# Altium PCB DashBoard.PcbDoc (part 1 of 2)
Units mm, origin at the board's own origin, x right, y up, seen from the top; angles counter-clockwise.
Board outline 137.91 x 120.93 mm, 2 copper layers (Top Layer, Bottom Layer); 50 components, 83 nets, 335 pads, 92 vias.
Unrouted connection lines stored in the file: 1.
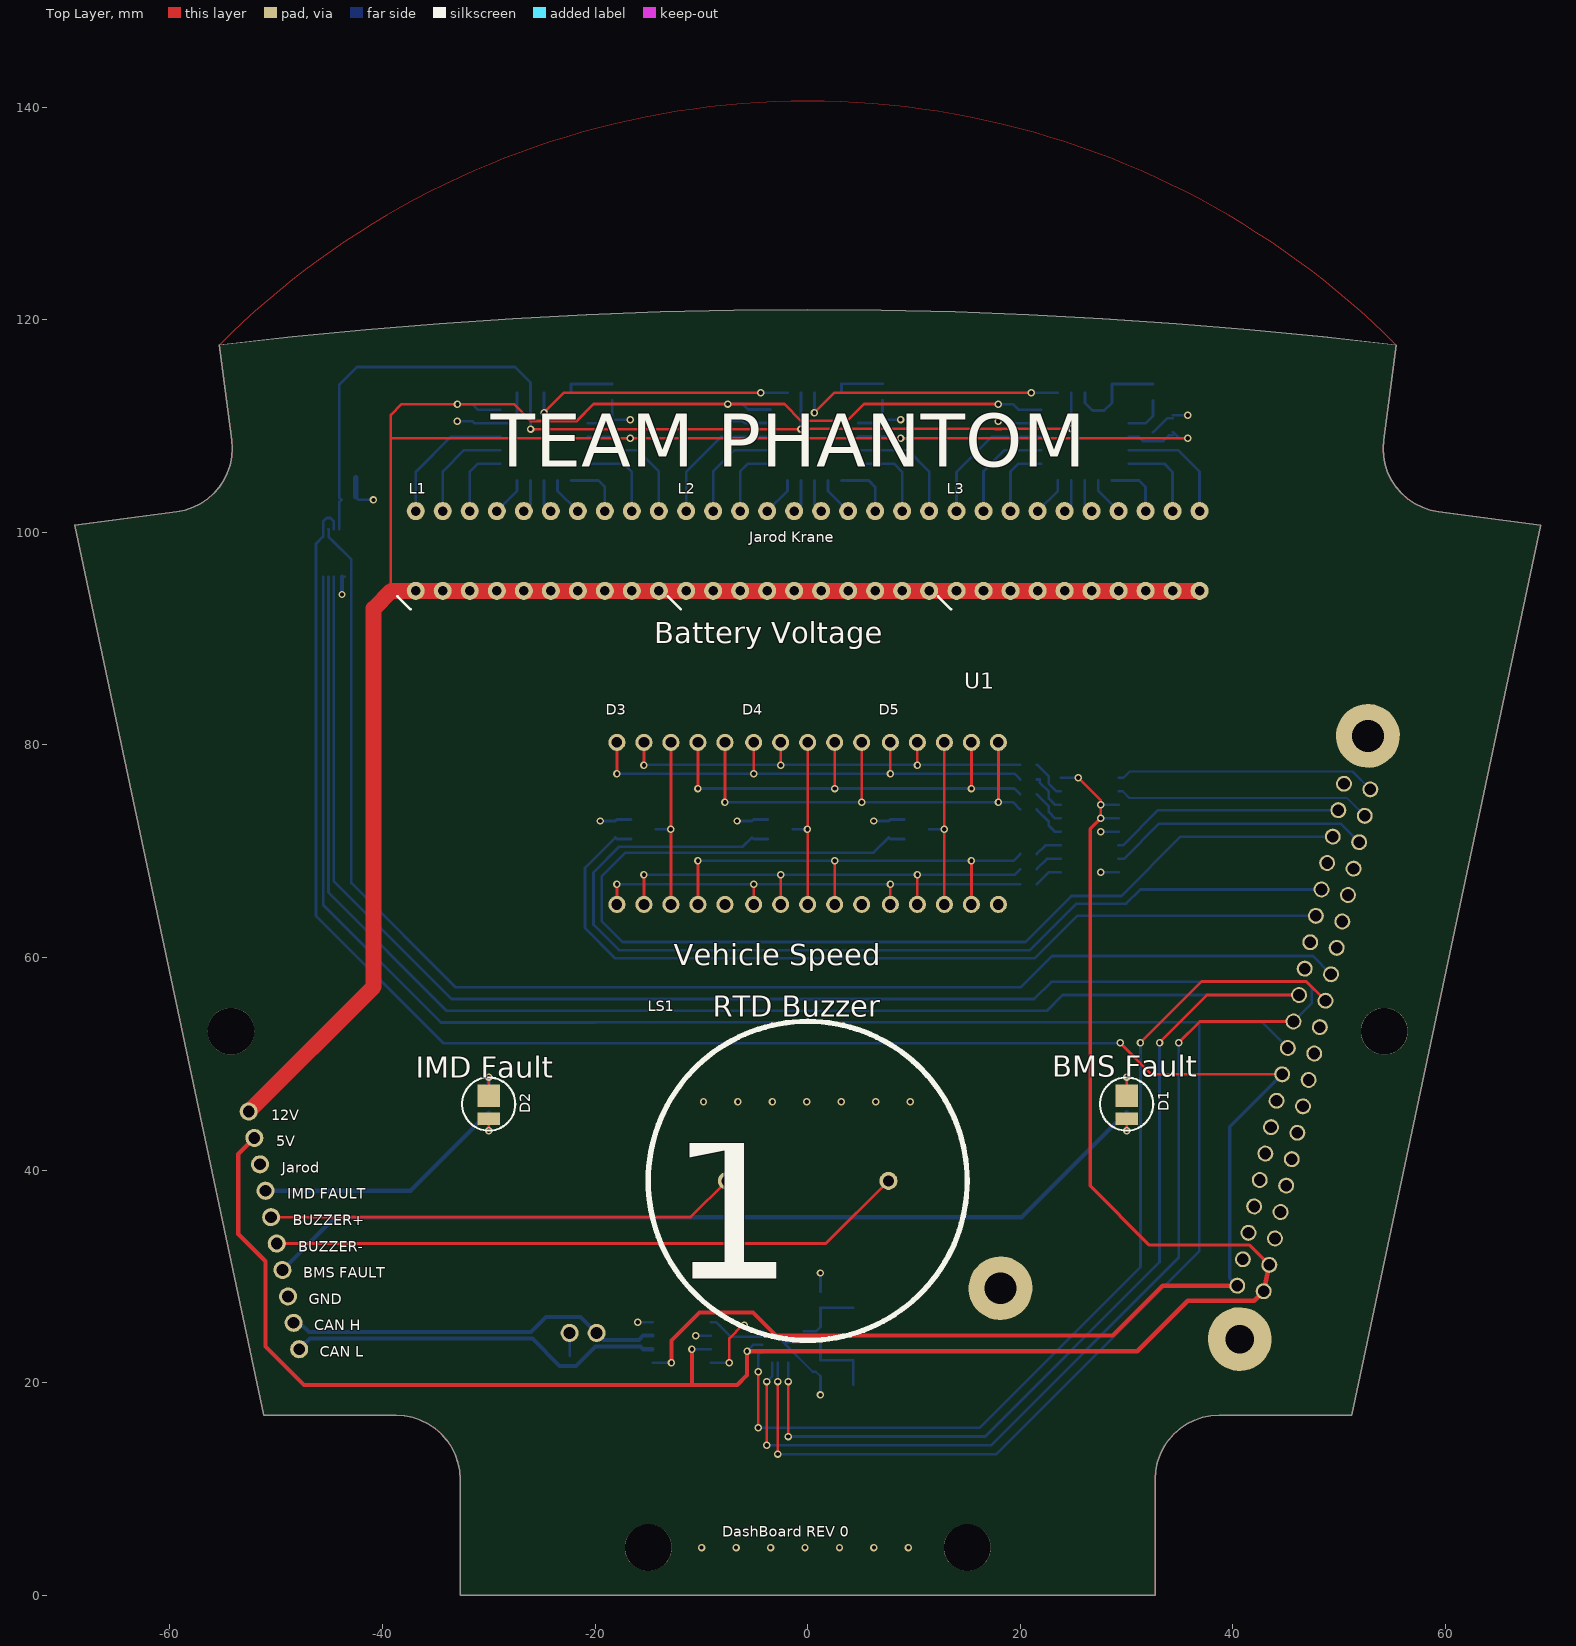
[diagram p0: Top Layer view]
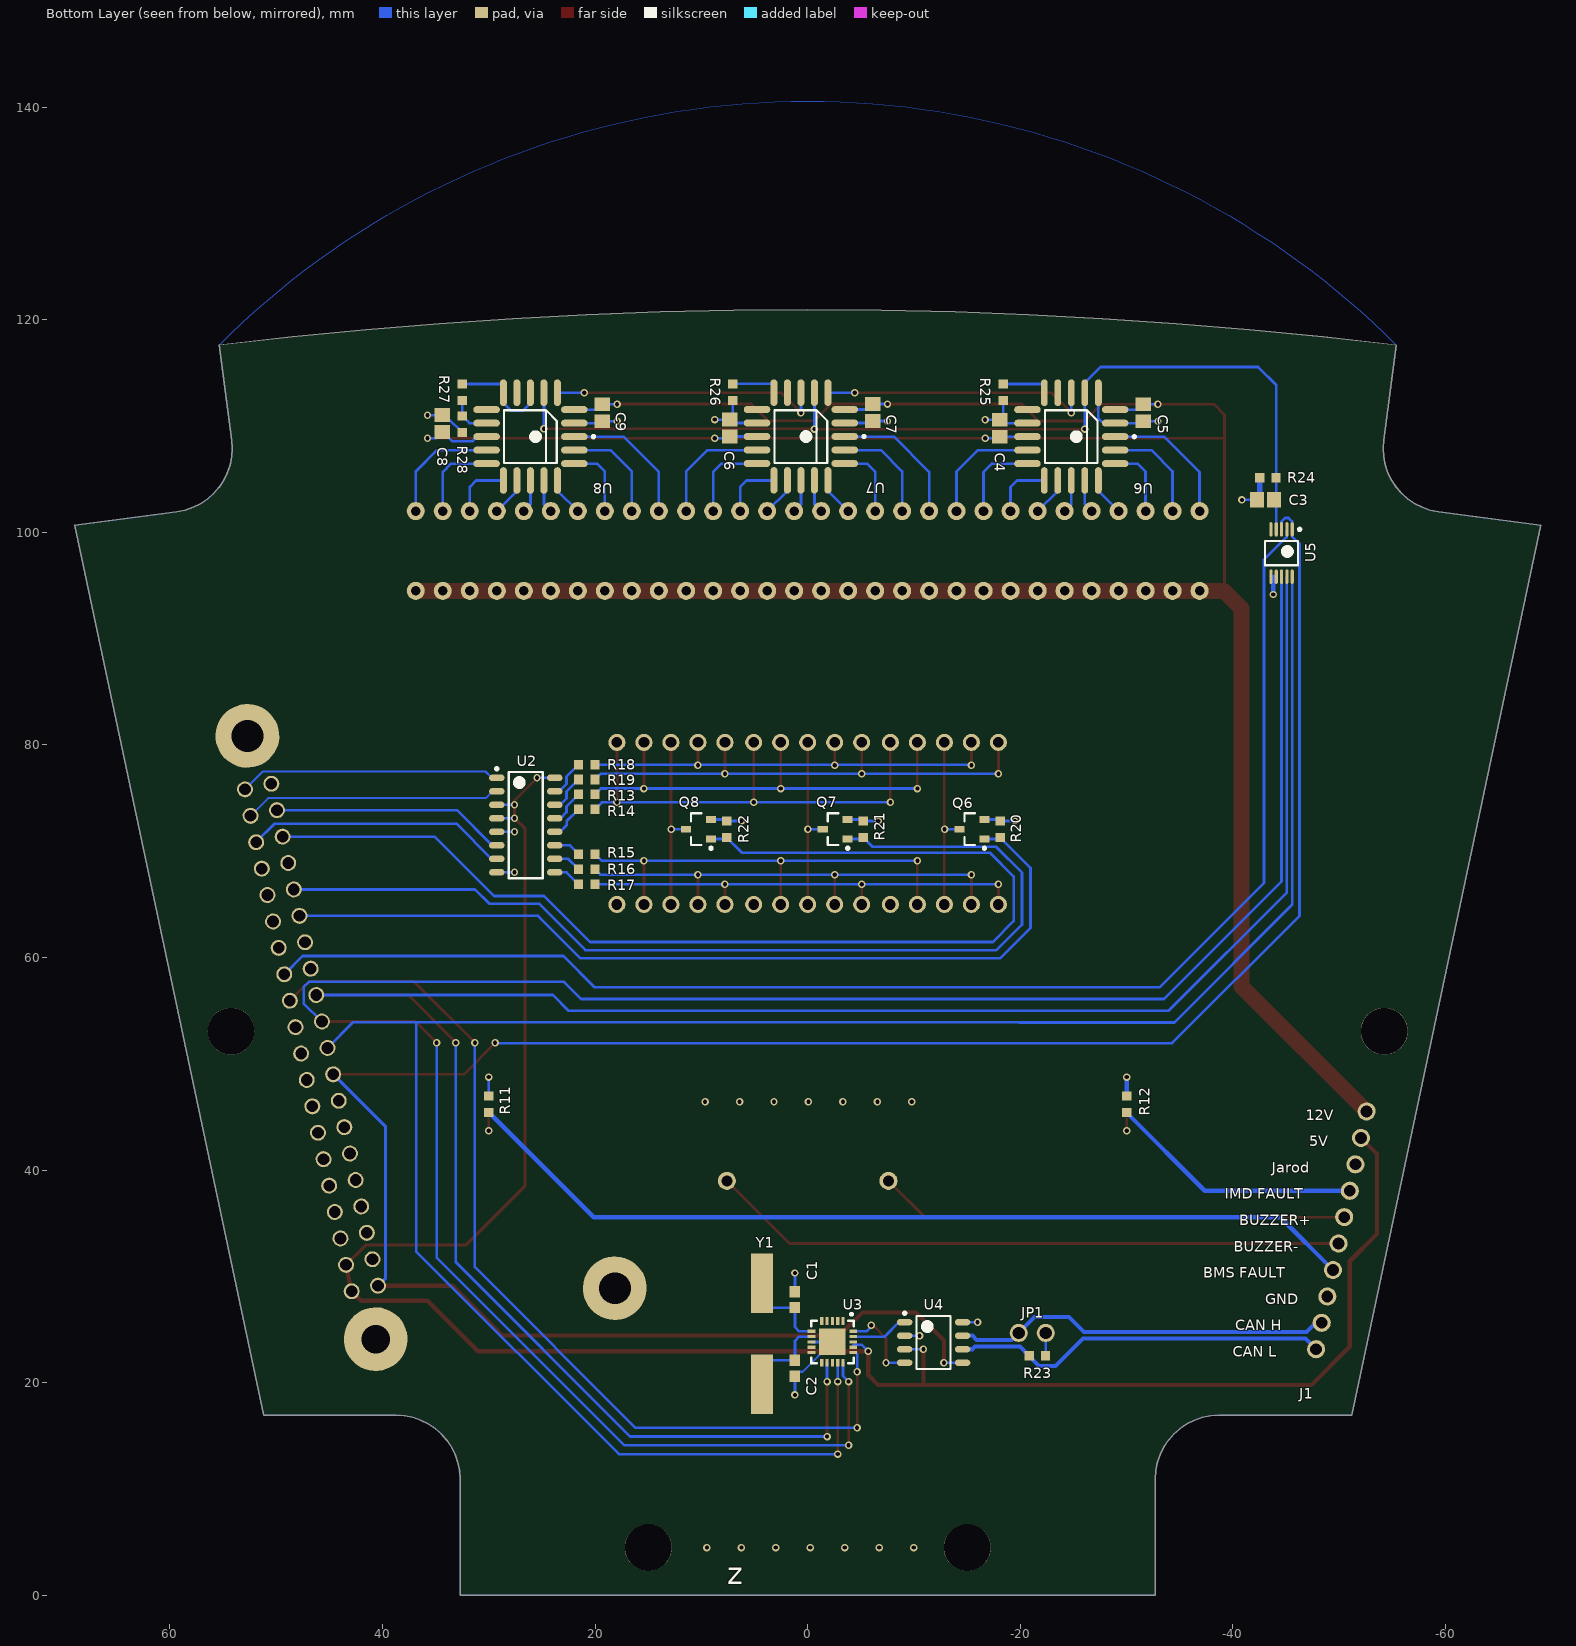
[diagram p1: Bottom Layer view, seen from below]
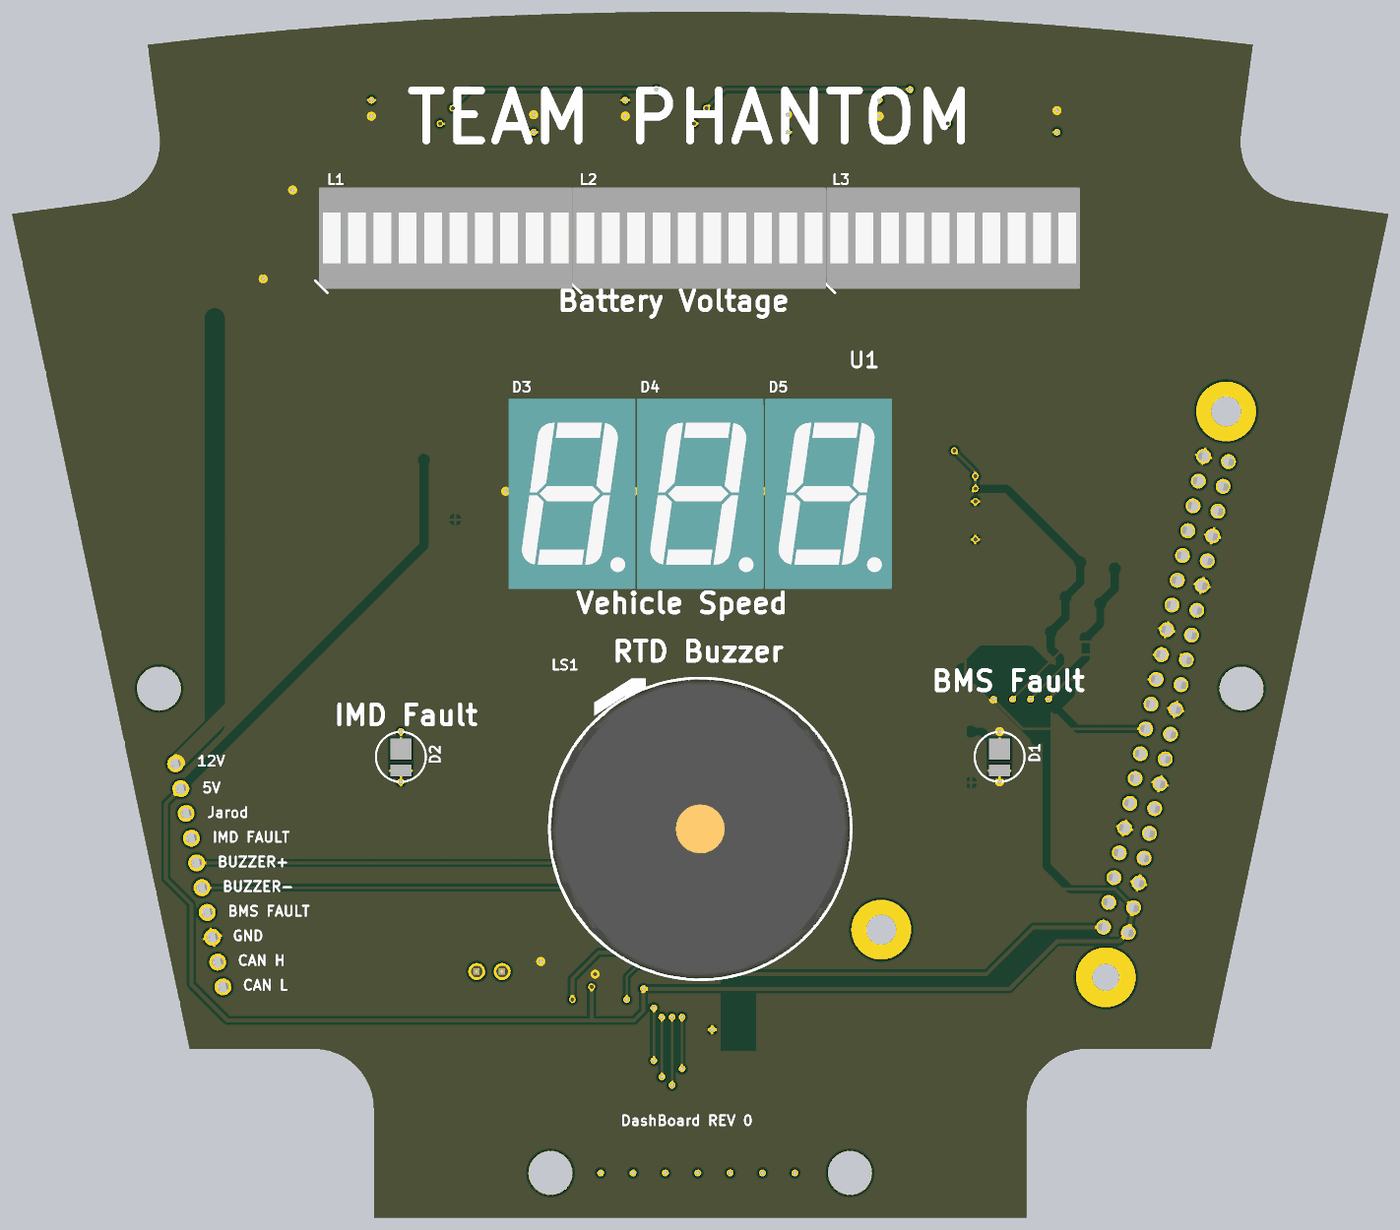
[diagram p2: 3D render of the assembled board from above, using the file's embedded part models]
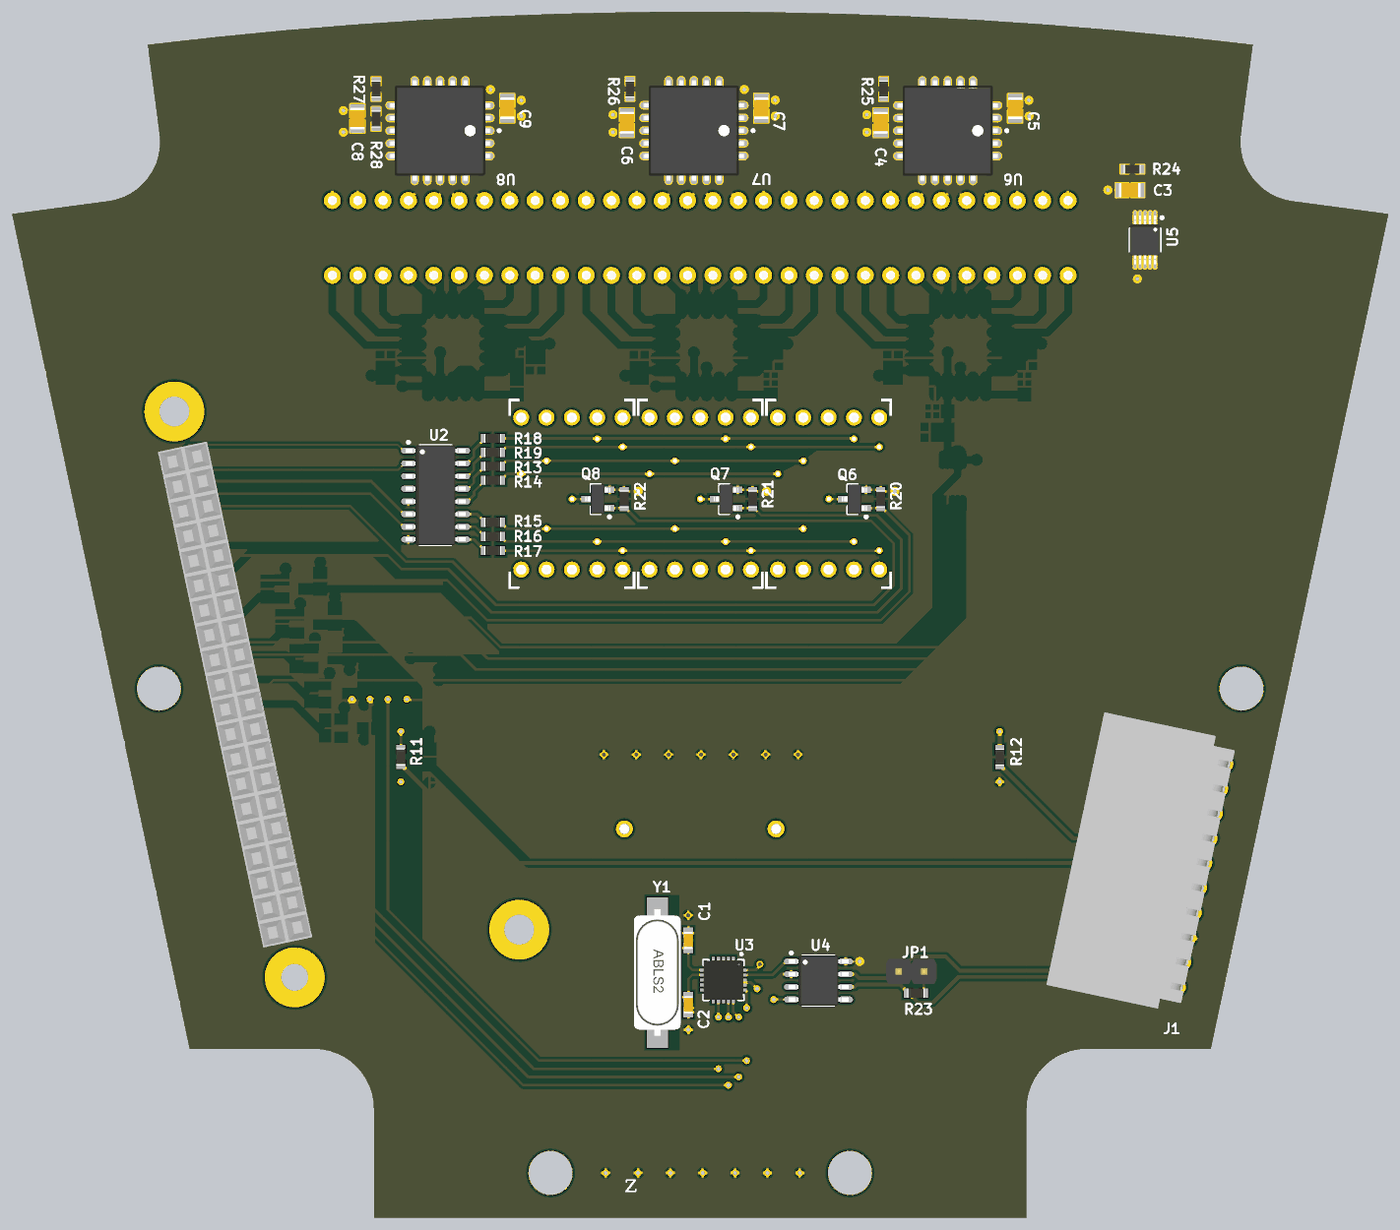
[diagram p3: 3D render of the assembled board from below, using the file's embedded part models]

## Layer stack, top to bottom
Top Solder: solder mask 0.0102, Solder Resist, Dk 3.5
Top Layer: signal copper 0.0356
Dielectric 1: dielectric 0.32, FR-4, Dk 4.8
Bottom Layer: signal copper 0.0356
Bottom Solder: solder mask 0.0102, Solder Resist, Dk 3.5

## Board outline
55.363,117.618 48.47,118.394 41.565,119.067 34.652,119.637 27.731,120.103 20.804,120.466 13.872,120.725 6.937,120.881 0,120.933 -6.937,120.881 -13.872,120.725 -20.804,120.466 -27.731,120.103 -34.652,119.637 -41.565,119.067 -48.47,118.394 -55.363,117.618 -54.173,108.674 -54.12,107.891 -54.171,107.108 -54.323,106.338 -54.574,105.594 -54.92,104.89 -55.355,104.237 -55.872,103.646 -56.461,103.128 -57.113,102.691 -57.817,102.343 -58.56,102.089 -59.329,101.935 -68.954,100.654 -51.163,16.954 -38.695,16.954 -37.912,16.903 -37.142,16.75 -36.399,16.498 -35.695,16.151 -35.042,15.715 -34.452,15.197 -33.935,14.607 -33.499,13.954 -33.152,13.251 -32.899,12.507 -32.746,11.738 -32.695,10.954 -32.695,0.006 32.695,0.006 32.695,10.954 32.746,11.738 32.899,12.507 33.152,13.251 33.499,13.954 33.935,14.607 34.452,15.197 35.042,15.715 35.695,16.151 36.399,16.498 37.142,16.75 37.912,16.903 38.695,16.954 51.163,16.954 68.954,100.654 59.329,101.935 58.56,102.089 57.818,102.342 57.115,102.69 56.464,103.126 55.875,103.643 55.358,104.233 54.923,104.885 54.576,105.589 54.325,106.331 54.172,107.1 54.12,107.883 54.173,108.674

## Design rules (kind name [scope] priority, off if disabled: settings)
Clearance [All] p1: gap=0.254 ignorepadtopadclearanceinfootprint=TRUE except(0: Arc-Hole Track-Hole SMDPad-Hole THPad-Hole Via-Hole Fill-Hole Poly-Hole Region-Hole Text-Hole; 0.127: Arc-Arc Arc-Track Track-Track; 0.2: Arc-SMDPad Track-SMDPad SMDPad-SMDPad)
ComponentClearance [All] p1: gap=0.01 collisioncheckmode=3 verticalgap=0.254 showdistances=FALSE
DiffPairsRouting [All] p1: maxlimit=0.254 minlimit=0.254 mostfreqgap=0.254 toplayer_minwidth=0.381 toplayer_maxwidth=0.381 toplayer_prefwidth=0.381 bottomlayer_minwidth=0.381 bottomlayer_maxwidth=0.381 bottomlayer_prefwidth=0.381 maxuncoupledlength=12.7
PolygonConnect [All] p1: connectstyle=Relief reliefconductorwidth=0.254 reliefentries=4 polygonreliefangle="90 Angle" airgapwidth=0.254
RoutingVias [All] p1: holewidth=0.711 width=1.27 viastyle="Through Hole" minholewidth=0.6 minwidth=0.3 maxholewidth=0.711 maxwidth=1.27
SolderMaskExpansion [All] p1: expansion=0.102
Width [All] p1: maxlimit=3 minlimit=0.127 preferedwidth=0.254 minimp=50.000000 maximp=50.000000 favimp=50.000000
28 further rules are at their usual default settings.

## Classes and differential pairs
component class VoltageLEDs: C4 C5 C6 C7 C8 C9 L1 L2 L3 R25 R26 R27 R28 U6 U7 U8
component class SPI: C1 C2 C3 JP1 R23 R24 U3 U4 U5 Y1
component class SpeedLEDs: D3 D4 D5 Q6 Q7 Q8 R13 R14 R15 R16 R17 R18 R19 R20 R21 R22 U2
component class Connector: D1 D2 J1 LS1 R11 R12 U1
differential pair CAN: +CAN_P -CAN_N

## Components (designator, comment, footprint, x,y, rotation, side; value= is the part's Value field where it differs from the comment)
C1 "15pF" CAP-0603 1.2,27.825 r270 bottom
C2 "15pF" CAP-0603 1.2,21.375 r90 bottom
C3 "0.1uF" CAP-0805 -43.05,103.05 r180 bottom
C4 "1uF" CAP-0805 -18.085,109.795 r270 bottom
C5 "0.1uF" CAP-0805 -31.555,111.25 r90 bottom
C6 "1uF" CAP-0805 7.345,109.8 r270 bottom
C7 "0.1uF" CAP-0805 -6.115,111.26 r90 bottom
C8 "1uF" CAP-0805 34.36,110.22 r270 bottom
C9 "0.1uF" CAP-0805 19.325,111.25 r90 bottom
D1 "Red" LED 30,47 r270 top
D2 "Red" LED -30,47 r270 top
D3 "SC56-11SRWA" 7-seg -17.94,65 r0 top locked
D4 "SC56-11SRWA" 7-seg -5.08,65 r0 top locked
D5 "SC56-11SRWA" 7-seg 7.78,65 r0 top locked
J1 "WM4932-ND" 10PIN -52.575,45.525 r282 bottom
JP1 "732-5315-ND" 2PIN-JP -19.85,24.7 r180 bottom
L1 "754-1176-5-ND" LEDBAR-10 -36.86,94.5 r0 top
L2 "754-1179-5-ND" LEDBAR-10 -11.43,94.5 r0 top
L3 "67-1008-ND" LEDBAR-10 14,94.5 r0 top
LS1 "102-1141-ND" Buzzer -7.6,39 r0 top locked
Q6 "DMN6140L-13DICT-ND" SOT-23-3 -15.45,72.075 r0 bottom
Q7 "DMN6140L-13DICT-ND" SOT-23-3 -2.59,72.075 r0 bottom
Q8 "DMN6140L-13DICT-ND" SOT-23-3 10.27,72.075 r0 bottom
R11 "44R" RES-0603 30,46.225 r90 bottom
R12 "44R" RES-0603 -30,46.2 r90 bottom
R13 "270R" RES-0603 20.78,75.35 r180 bottom
R14 "270R" RES-0603 20.78,73.95 r180 bottom
R15 "270R" RES-0603 20.78,69.74 r180 bottom
R16 "270R" RES-0603 20.78,68.315 r180 bottom
R17 "270R" RES-0603 20.78,66.89 r180 bottom
R18 "270R" RES-0603 20.78,78.15 r180 bottom
R19 "270R" RES-0603 20.78,76.75 r180 bottom
R20 "10K" RES-0603 -18.095,72.075 r270 bottom
R21 "10K" RES-0603 -5.235,72.075 r270 bottom
R22 "10K" RES-0603 7.625,72.075 r270 bottom
R23 "120R" RES-0603 -21.615,22.54 r180 bottom
R24 "10K" RES-0603 -43.295,105.15 r180 bottom
R25 "1K" RES-0603 -18.385,113.175 r90 bottom
R26 "1K" RES-0603 7.045,113.185 r90 bottom
R27 "2.2K" RES-0603 32.485,113.175 r90 bottom
R28 "3.3K" RES-0603 32.485,110.175 r90 bottom
U1 "RaspberryPi 4 Launchpad" "RPI CONNECTOR" 50,85 r258 top locked
U2 "MC14511BDR2G" SOIC16 26.516,72.465 r180 bottom
U3 "MCP2515" QFN20-EP -2.325,23.85 r270 bottom
U4 "MCP2562T-E/SNCT-ND" "8-SOIC w/o THRM" -11.85,23.8 r180 bottom
U5 "MCP48FVB01T-E/UN" 10MSOP -44.57,98.05 r270 bottom
U6 "LM3914VX/NOPB" PLCC127P990X990X457-20N -24.795,109 r270 bottom
U7 "LM3914VX/NOPB" PLCC127P990X990X457-20N 0.635,109.01 r270 bottom
U8 "LM3914VX/NOPB" PLCC127P990X990X457-20N 26.075,109 r270 bottom
Y1 "535-9875-1-ND" CRYSTAL-ABLS2 4.3,29.35 r270 bottom

## Footprints (in the part's own frame and the unit in brackets; to place one, negate y for a bottom-side part, rotate by r counter-clockwise, add the part's x,y. Pads: shape width x height; smd on the part's side, far side on the other; paste and mask are expansions set on the pad)
2PIN-JP [mm]
  round 1.7 hole 1.15: 1(0,0) 2(2.54,0)
  body extent -1.24,-1.27 3.84,1.27, height 8.57
7-seg [mm]
  round 1.6 hole 1 unplated: 1(0,0) 2(2.54,0) 3(5.08,0) 4(7.62,0) 5(10.16,0) 6(10.16,15.24) 7(7.62,15.24) 8(5.08,15.24) 9(2.54,15.24) 10(0,15.24)
  body extent -1.27,-1.92 11.43,17.13, height 7.5
"8-SOIC w/o THRM" [mm] "SOIC, 8-Leads, Body 4.90x3.90mm, Pitch 1.27mm, IPC Medium Density"
  oval 1.45x0.6 smd: 1(-2.725,1.905) 2(-2.725,0.635) 3(-2.725,-0.635) 4(-2.725,-1.905) 5(2.725,-1.905) 6(2.725,-0.635) 7(2.725,0.635) 8(2.725,1.905)
  silkscreen extent -2.85,-2.5 1.6,2.88, body extent -3,-2.5 3,2.5, height 1.7
10MSOP [mm] "TSSOP, 10-Leads, Body 3.00x3.00mm, Pitch 0.50mm, IPC Medium Density"
  oval 1.35x0.3 smd: 1(-2.225,1) 2(-2.225,0.5) 3(-2.225,0) 4(-2.225,-0.5) 5(-2.225,-1) 6(2.225,-1) 7(2.225,-0.5) 8(2.225,0) 9(2.225,0.5) 10(2.225,1)
  silkscreen extent -2.35,-1.55 1.15,1.82, body extent -2.45,-1.55 2.45,1.55, height 1.1
10PIN [mm]
  round 1.7 hole 1.11: 1(0,0) 2(2.54,0) 3(5.08,0) 4(7.62,0) 5(10.16,0) 6(12.7,0) 7(15.24,0) 8(17.78,0) 9(20.32,0) 10(22.86,0)
  body extent -2.54,-12.89 25.4,0.69, height 7.06
Buzzer [mm]
  round 1.7 hole 1.05: 1(0,0) 2(15.2,0)
  silkscreen extent -7.4,-15 22.6,15, body extent -7.4,-15 22.6,15, height 10
CAP-0603 [mm] "Chip Capacitor, 2-Leads, Body 1.60x0.80mm, IPC Medium Density"
  rect 1.05x1 smd: 1(-0.75,0) 2(0.75,0)
  body extent -0.87,-0.48 0.88,0.47, height 0.9
CAP-0805 [mm] "Chip Capacitor, 2-Leads, Body 2.00x1.25mm, IPC Medium Density"
  rect 1.3x1.45 smd: 1(-0.8,0) 2(0.8,0)
  body extent -1.1,-0.73 1.1,0.72, height 1.35
CRYSTAL-ABLS2 [mm]
  rect 5.6x2.1 smd: 1(0,0) 2(9.5,0)
  body extent -1.6,-2.35 11.1,2.35, height 3.24
LED [mm]
  rect 2.1x2.1 smd: 1(0,0)
  rect 1.2x2.1 smd: 2(2.15,0)
LEDBAR-10 [mm]
  round 1.7 hole 0.9: 1(0,0) 2(2.54,0) 3(5.08,0) 4(7.62,0) 5(10.16,0) 6(12.7,0) 7(15.24,0) 8(17.78,0) 9(20.32,0) 10(22.86,0) 11(22.86,7.5) 12(20.32,7.5) 13(17.78,7.5) 14(15.24,7.5) 15(12.7,7.5) 16(10.16,7.5) 17(7.62,7.5) 18(5.08,7.5) 19(2.54,7.5) 20(0,7.5)
  silkscreen extent -1.73,-1.75 -0.5,-0.53, body extent -1.35,-1.35 24.05,8.81, height 8
PLCC127P990X990X457-20N [mm] "Leaded Chip Carrier, 20-Leads, Body 9.91x9.91mm, Pitch 1.270mm, IPC Medium Density"
  oval 0.65x2.5 smd: 1(0,4.125) 2(-1.27,4.125) 3(-2.54,4.125) 9(-2.54,-4.125) 10(-1.27,-4.125) 11(0,-4.125) 12(1.27,-4.125) 13(2.54,-4.125) 19(2.54,4.125) 20(1.27,4.125)
  oval 2.5x0.65 smd: 4(-4.125,2.54) 5(-4.125,1.27) 6(-4.125,0) 7(-4.125,-1.27) 8(-4.125,-2.54) 14(4.125,-2.54) 15(4.125,-1.27) 16(4.125,0) 17(4.125,1.27) 18(4.125,2.54)
  silkscreen extent -2.48,-2.47 2.47,6.05, body extent -5.15,-5.15 5.15,5.15, height 4.57
QFN20-EP [mm]
  rect 0.73x0.3 smd: 1(-1.965,1) 2(-1.965,0.5) 3(-1.965,0) 4(-1.965,-0.5) 5(-1.965,-1) 11(1.965,-1) 12(1.965,-0.5) 13(1.965,0) 14(1.965,0.5) 15(1.965,1)
  rect 0.3x0.73 smd: 6(-1,-1.965) 7(-0.5,-1.965) 8(0,-1.965) 9(0.5,-1.965) 10(1,-1.965) 16(1,1.965) 17(0.5,1.965) 18(0,1.965) 19(-0.5,1.965) 20(-1,1.965)
  rect 2.5x2.5 smd: 21(0,0)
  silkscreen extent -2.7,-2 2,2, body extent -2,-2 2,2, height 0.92
RES-0603 [mm] "Chip Resistor, 2-Leads, Body 1.60x0.80mm, IPC Medium Density"
  rect 0.85x0.9 smd: 1(-0.775,0) 2(0.775,0)
  body extent -0.85,-0.45 0.85,0.45, height 0.55
"RPI CONNECTOR" [mm]
  round 6 hole 3 unplated: 0(3.5,3.5)
  round 6 hole 3: 0(61.5,-19.5)
  round 6 hole 2.7 unplated: 0(61.5,3.5)
  round 1.5 hole 1.1 unplated: 1(56.63,2.23) 2(56.63,4.77) 3(54.09,2.23) 4(54.09,4.77) 5(51.55,2.23) 6(51.55,4.77) 7(49.01,2.23) 8(49.01,4.77) 9(46.47,2.23) 10(46.47,4.77) 11(43.93,2.23) 12(43.93,4.77) 13(41.39,2.23) 14(41.39,4.77) 15(38.85,2.23) 16(38.85,4.77) 17(36.31,2.23) 18(36.31,4.77) 19(33.77,2.23) 20(33.77,4.77) 21(31.23,2.23) 22(31.23,4.77) 23(28.69,2.23) 24(28.69,4.77) 25(26.15,2.23) 26(26.15,4.77) 27(23.61,2.23) 28(23.61,4.77) 29(21.07,2.23) 30(21.07,4.77) 31(18.53,2.23) 32(18.53,4.77) 33(15.99,2.23) 34(15.99,4.77) 35(13.45,2.23) 36(13.45,4.77) 37(10.91,2.23) 38(10.91,4.77) 39(8.37,2.23) 40(8.37,4.77)
  body extent 7.13,0.94 57.93,5.96, height 2.51
SOIC16 [mm] "SOIC, 16-Leads, Body 9.90x3.90mm, Pitch 1.27mm, IPC Medium Density"
  oval 1.45x0.6 smd: 1(-2.725,4.445) 2(-2.725,3.175) 3(-2.725,1.905) 4(-2.725,0.635) 5(-2.725,-0.635) 6(-2.725,-1.905) 7(-2.725,-3.175) 8(-2.725,-4.445) 9(2.725,-4.445) 10(2.725,-3.175) 11(2.725,-1.905) 12(2.725,-0.635) 13(2.725,0.635) 14(2.725,1.905) 15(2.725,3.175) 16(2.725,4.445)
  silkscreen extent -2.85,-5 1.6,5.42, body extent -3,-5 3,5, height 1.75
SOT-23-3 [mm] "SOT23, 3-Leads, Body 2.90x2.40mm, Pitch 0.92mm, IPC Medium Density"
  rect 0.95x0.65 smd: 1(-1.175,0.915) 2(1.175,0) 3(-1.175,-0.915)
  silkscreen extent -1.3,-1.5 0.7,1.91, body extent -1.25,-1.5 1.25,1.5, height 1.1

## Part data
C1 C2: library part 0603-15pF-100V, "CAP CER 15PF 100V C0G/NP0 0603", Case/Package=0603, Case Code (Metric)=1608, Dielectric=C0G, Manufacturer=Murata, Manufacturer Part Number=GRM1885C2A150JA01D, Max Operating Temperature=125°C, Min Operating Temperature=-55°C, Package Quantity=1, Supplier Part Number 1=490-1331-6-ND, Tolerance=5%, Voltage=100V, Capacitance=15pF, Case Code (Imperial)=0603, ComponentLink1Description=http://components.arrow.com/part/dataview/40422412S9717204N2606?src-supplier=Arrow, ComponentLink1URL=http://components.arrow.com/part/dataview/40422412S9717204N2606?src-supplier=Arrow, ComponentLink2Description=http://psearch.murata.com/capacitor/product/GRM1885C2A150JA01%23.pdf?src-supplier=Avnet, ComponentLink2URL=http://psearch.murata.com/capacitor/product/GRM1885C2A150JA01%23.pdf?src-supplier=Avnet, ComponentLink3Description=http://www.mouser.com/ds/2/281/c02e-2905.pdf?src-supplier=Mouser, ComponentLink3URL=http://www.mouser.com/ds/2/281/c02e-2905.pdf?src-supplier=Mouser, ComponentLink4Description=https://www.murata.com/~/media/webrenewal/support/library/catalog/products/capacitor/mlcc/c02e.ashx?la=en-us&src-supplier=Digi-Key, ComponentLink4URL=https://www.murata.com/~/media/webrenewal/support/library/catalog/products/capacitor/mlcc/c02e.ashx?la=en-us&src-supplier=Digi-Key, ComponentLink5Description=http://search.murata.co.jp/Ceramy/image/img/A01X/partnumbering_e_01.pdf?src-supplier=Digi-Key, ComponentLink5URL=http://search.murata.co.jp/Ceramy/image/img/A01X/partnumbering_e_01.pdf?src-supplier=Digi-Key, ComponentLink6Description=https://produktinfo.conrad.com/datenblaetter/450000-474999/451247-da-01-en-VS_KONDENSATOR_0603.pdf?src-supplier=Conrad, ComponentLink6URL=https://produktinfo.conrad.com/datenblaetter/450000-474999/451247-da-01-en-VS_KONDENSATOR_0603.pdf?src-supplier=Conrad, Depth=0.8mm, Height=0.8mm, Lead Free="Lead Free", Length=1.6mm, Material=Ceramic, Mount="Surface Mount", Packaging="Tape and Reel", Pricing 1="1=0.12, 10=0.088, 100=0.0413, 500=0.02896, 1000=0.02397 (USD)", Radiation Hardening=No, Stock 1=216098, Supplier 1=Digi-Key, Termination=SMD/SMT, Thickness=0.035inch, Voltage Rating=100V, Voltage Rating (DC)=100V, Width=0.8mm
C3 C5 C7 C9: library part C0805C104Z5VACTU, "CAP CER 0.1UF 50V Y5V 0805", Capacitance=100nF, Case/Package=0805, Case Code (Metric)=2012, Dielectric=Y5V, Dielectric Material=Ceramic, Manufacturer=KEMET, Max Operating Temperature=85°C, Min Operating Temperature=-30°C, Package Quantity=1, Supplier Part Number 1=399-1177-6-ND, Tolerance=80%, Voltage=50V, Case Code (Imperial)=0805, ComponentLink1Description=http://www.alliedelec.com/m/d/9bfe7773041ffe9d406e68bc7b377fdd.pdf?src-supplier=Allied+Electronics, ComponentLink1URL=http://www.alliedelec.com/m/d/9bfe7773041ffe9d406e68bc7b377fdd.pdf?src-supplier=Allied+Electronics, ComponentLink2Description=https://www.verical.com/server-webapp/html/getDatasheet?partID=37101&src-supplier=Verical, ComponentLink2URL=https://www.verical.com/server-webapp/html/getDatasheet?partID=37101&src-supplier=Verical, ComponentLink3Description=https://www.verical.com/server-webapp/html/getDatasheet?partID=321176&src-supplier=Verical, ComponentLink3URL=https://www.verical.com/server-webapp/html/getDatasheet?partID=321176&src-supplier=Verical, ComponentLink4Description=http://www.farnell.com/datasheets/2123124.pdf?src-supplier=Element14, ComponentLink4URL=http://www.farnell.com/datasheets/2123124.pdf?src-supplier=Element14, Depth=1.25mm, Dissipation Factor=5%, Height=0.9mm, Lead Free="Lead Free", Lead Pitch=0.75mm, Length=2mm, Manufacturer Part Number=C0805C104Z5VACTU, Mount="Surface Mount,PCB", Number of Pins=2, Packaging="Tape and Reel", Pricing 1="1=0.1, 10=0.057, 100=0.0254, 500=0.01818, 1000=0.01428 (USD)", Radiation Hardening=No, REACH SVHC="No SVHC", Stock 1=929243, Supplier 1=Digi-Key, Termination=SMD/SMT, Thickness=0.039inch, Voltage Rating=50V, Voltage Rating (DC)=50V, Width=0.049inch
C4 C6 C8: library part C0805C105K5PACTU, "CAP CER 1UF 50V X5R 0805", Case/Package=0805, Case Code (Metric)=2012, Dielectric=X5R, Dielectric Material=Ceramic, Manufacturer=KEMET, Max Operating Temperature=85°C, Min Operating Temperature=-55°C, Package Quantity=2500, Supplier Part Number 1=399-15436-6-ND, Tolerance=10%, Voltage Rating=50V, Capacitance=1uF, Case Code (Imperial)=0805, ComponentLink1Description=https://api.kemet.com/component-edge/download/datasheet/C0805C105K5PAC7800.pdf?src-supplier=Digi-Key, ComponentLink1URL=https://api.kemet.com/component-edge/download/datasheet/C0805C105K5PAC7800.pdf?src-supplier=Digi-Key, ComponentLink2Description=http://www.farnell.com/datasheets/2746140.pdf?src-supplier=Farnell, ComponentLink2URL=http://www.farnell.com/datasheets/2746140.pdf?src-supplier=Farnell, ComponentLink3Description=http://www.mouser.com/ds/2/212/KEM_C1006_X5R_SMD-1103249.pdf?src-supplier=Mouser, ComponentLink3URL=http://www.mouser.com/ds/2/212/KEM_C1006_X5R_SMD-1103249.pdf?src-supplier=Mouser, ComponentLink4Description=http://www.farnell.com/datasheets/2746140.pdf?src-supplier=Newark, ComponentLink4URL=http://www.farnell.com/datasheets/2746140.pdf?src-supplier=Newark, ComponentLink5Description=http://www.farnell.com/datasheets/2032728.pdf?src-supplier=Element14, ComponentLink5URL=http://www.farnell.com/datasheets/2032728.pdf?src-supplier=Element14, Lead Free="Lead Free", Length=0.079inch, Manufacturer Part Number=C0805C105K5PACTU, Mount="Surface Mount", Packaging="Tape and Reel", Pricing 1="1=0.33, 10=0.23, 100=0.1378, 500=0.10334, 1000=0.08726 (USD)", REACH SVHC="No SVHC", Stock 1=7193, Supplier 1=Digi-Key, Termination=SMD/SMT, Thickness=0.055inch, Voltage Rating (DC)=50V, Weight=0.000194oz, Width=0.049inch
D1 D2: library part RED_LED, "2835 PLCC2 RED WLD: 620NM TYP. 1", Case/Package=1113, Forward Voltage=2.4V, Lens Color=Colorless, Manufacturer=QT-Brightek, Manufacturer Part Number=QBHP686-RH, Supplier Part Number 1=1516-1369-6-ND, Test Current=150mA, Case Code (Imperial)=1113, Color=Red, ComponentLink1Description="http://www.qt-brightek.com/datasheet/QBHP686-XXH Series.pdf?src-supplier=Digi-Key", ComponentLink1URL="http://www.qt-brightek.com/datasheet/QBHP686-XXH Series.pdf?src-supplier=Digi-Key", Dominant Wavelength=620nm, Height=1mm, Length=3.1mm, Lens Style=Flat, Lens Transparency=Clear, Mount="Surface Mount", Packaging="Tape and Reel", Pricing 1="1=0.85, 10=0.553, 100=0.3625, 1000=0.2862 (USD)", Stock 1=3207, Supplier 1=Digi-Key, Viewing Angle=120°, Width=2.8mm
D3 D4 D5: library part 7-segment, "DISPLAY 7SEG 0.56\" SGL RED 10DIP", Case/Package=DIP, Color=Red, Forward Current=20mA, Forward Voltage=1.85V, Manufacturer=Kingbright, Max Operating Temperature=85°C, Max Power Dissipation=75mW, Min Operating Temperature=-40°C, Package Quantity=40, Supplier Part Number 1=754-1467-5-ND, ComponentLink1Description=http://www.farnell.com/datasheets/2047590.pdf?src-supplier=Element14, ComponentLink1URL=http://www.farnell.com/datasheets/2047590.pdf?src-supplier=Element14, ComponentLink2Description=http://www.mouser.com/ds/2/216/SC56-11SRWA-66719.pdf?src-supplier=Mouser, ComponentLink2URL=http://www.mouser.com/ds/2/216/SC56-11SRWA-66719.pdf?src-supplier=Mouser, ComponentLink3Description=http://www.kingbrightusa.com/images/catalog/SPEC/SC56-11SRWA.pdf?src-supplier=Future+Electronics, ComponentLink3URL=http://www.kingbrightusa.com/images/catalog/SPEC/SC56-11SRWA.pdf?src-supplier=Future+Electronics, Display Type=Segment, Element Configuration="Common Cathode", Height=0.75inch, Illumination Color=Red, Lead Free="Lead Free", Luminous Intensity=34mcd, Manufacturer Part Number=SC56-11SRWA, Number of Characters=1, Operating Supply Voltage=1.85V, Packaging=Bulk, Power Consumption=75mW, Pricing 1="1=1.96, 10=1.24, 100=0.9177, 500=0.84334, 1000=0.702 (USD)", REACH SVHC="No SVHC", RoHS Compliant=Yes, Stock 1=32391, Supplier 1=Digi-Key, Test Current=20mA, Wavelength=640nm, Width=0.5inch
J1: library part 10PIN, "CONN HEADER R/A 10POS 2.54MM", Color=Black, Contact Resistance=30mR, Manufacturer=Molex, Manufacturer Part Number=0705530044, Max Operating Temperature=105°C, Min Operating Temperature=-40°C, ComponentLink1Description=http://www.molex.com/webdocs/datasheets/pdf/en-us/0705530044_PCB_HEADERS.pdf?src-supplier=Avnet, ComponentLink1URL=http://www.molex.com/webdocs/datasheets/pdf/en-us/0705530044_PCB_HEADERS.pdf?src-supplier=Avnet, Connector Type="Male Pin", Contact Material=Bronze, Contact Mating Length=0.24inch, Contact Plating=Tin, Depth=13.59mm, Gender=Male, Housing Color=Black, Housing Material=Polyester, Length=27.95mm, Mount="Through Hole", Number of Contacts=10, Number of Positions=10, Number of Rows=1, Orientation="Right Angle", Packaging=Rail/Tube, Pitch=2.54mm, Pricing 1="1=2.61, 10=2.367, 100=2.0288, 500=1.69068, 1000=1.44915, 5000=1.28491 (USD)", Stock 1=1173, Supplier 1=Digi-Key, Supplier Part Number 1=WM4932-ND, Termination=Solder
JP1: library part 2PIN-TEST, "CONN HEADER VERT 2POS 2.54MM"
L1: "LED BAR GRAPH 10SEG 627NM RED", Color=Red, Current=30mA, Forward Current=20mA, Forward Voltage=2V, Lens Color=White, Manufacturer=Kingbright, Manufacturer Part Number=DC-10EWA, Max Operating Temperature=85°C, Min Operating Temperature=-40°C, Package Quantity=20, ComponentLink1Description=https://www.distrelec.biz/Web/Downloads/12/75/tl661272-661275.pdf?mime=application%2Fpdf&src-supplier=Distrelec, ComponentLink1URL=https://www.distrelec.biz/Web/Downloads/12/75/tl661272-661275.pdf?mime=application%2Fpdf&src-supplier=Distrelec, ComponentLink2Description=http://www.mouser.com/ds/2/216/DC10EWA-8483.pdf?src-supplier=Mouser, ComponentLink2URL=http://www.mouser.com/ds/2/216/DC10EWA-8483.pdf?src-supplier=Mouser, ComponentLink3Description=http://www.kingbrightusa.com/images/catalog/SPEC/DC10EWA.pdf?src-supplier=Digi-Key, ComponentLink3URL=http://www.kingbrightusa.com/images/catalog/SPEC/DC10EWA.pdf?src-supplier=Digi-Key, ComponentLink4Description=http://uk.rs-online.com/webdocs/1385/0900766b81385017.pdf?src-supplier=RSComponents, ComponentLink4URL=http://uk.rs-online.com/webdocs/1385/0900766b81385017.pdf?src-supplier=RSComponents, ComponentLink5Description=http://www.rapidonline.com/pdf/55-0190e.pdf?src-supplier=Rapid+Electronics, ComponentLink5URL=http://www.rapidonline.com/pdf/55-0190e.pdf?src-supplier=Rapid+Electronics, ComponentLink6Description=http://www.farnell.com/datasheets/1683489.pdf?src-supplier=Element14, ComponentLink6URL=http://www.farnell.com/datasheets/1683489.pdf?src-supplier=Element14, ComponentLink7Description=http://www.produktinfo.conrad.com/datenblaetter/175000-199999/184837-da-01-en-RGB_ROT_LED_BAND.pdf?src-supplier=Conrad, ComponentLink7URL=http://www.produktinfo.conrad.com/datenblaetter/175000-199999/184837-da-01-en-RGB_ROT_LED_BAND.pdf?src-supplier=Conrad, ComponentLink8Description=http://www.produktinfo.conrad.com/datenblaetter/150000-174999/160137-da-01-en-BARGRAPH_ANZEIGE_TYP_DC_10EWA.pdf?src-supplier=Conrad, ComponentLink8URL=http://www.produktinfo.conrad.com/datenblaetter/150000-174999/160137-da-01-en-BARGRAPH_ANZEIGE_TYP_DC_10EWA.pdf?src-supplier=Conrad, Display Type="Bar Graph", Height=10.16mm, Illumination Color=Red, Lead Free="Lead Free", Length=25.4mm, Lens Size=1.78mm, Lens Style=Diffused, Luminous Intensity=9mcd, Mount="Through Hole", Number of LEDs=10, Number of Segments=10, Operating Supply Voltage=2V, Packaging=Rail/Tube, Pricing 1="1=2.79, 10=2.474, 100=1.4364, 500=1.2768, 1000=1.09725, 2500=1.0374, 5000=1.01346, 10000=0.9975, 25000=0.97356 (USD)", REACH SVHC="No SVHC", Stock 1=21, Supplier 1=Digi-Key, Supplier Part Number 1=754-1176-5-ND, Voltage Rating=2V, Wavelength=625nm, Width=25.4mm
L2: library part LEDBAR-10-YLW, "LED BAR GRAPH 10SEG 590NM YLW", Color=Yellow, Current=30mA, Forward Current=20mA, Forward Voltage=2.1V, Lens Color=White, Manufacturer=Kingbright, Manufacturer Part Number=DC-10YWA, Max Operating Temperature=85°C, Min Operating Temperature=-40°C, Package Quantity=20, ComponentLink1Description=http://www.rapidonline.com/pdf/55-0190e.pdf?src-supplier=Rapid+Electronics, ComponentLink1URL=http://www.rapidonline.com/pdf/55-0190e.pdf?src-supplier=Rapid+Electronics, ComponentLink2Description=https://www.distrelec.biz/Web/Downloads/12/75/tl661272-661275.pdf?mime=application%2Fpdf&src-supplier=Distrelec, ComponentLink2URL=https://www.distrelec.biz/Web/Downloads/12/75/tl661272-661275.pdf?mime=application%2Fpdf&src-supplier=Distrelec, ComponentLink3Description=http://www.kingbrightusa.com/images/catalog/SPEC/DC10YWA.pdf?src-supplier=Digi-Key, ComponentLink3URL=http://www.kingbrightusa.com/images/catalog/SPEC/DC10YWA.pdf?src-supplier=Digi-Key, ComponentLink4Description=http://uk.rs-online.com/webdocs/0026/0900766b80026db8.pdf?src-supplier=RSComponents, ComponentLink4URL=http://uk.rs-online.com/webdocs/0026/0900766b80026db8.pdf?src-supplier=RSComponents, ComponentLink5Description=http://www.farnell.com/datasheets/1683491.pdf?src-supplier=Element14, ComponentLink5URL=http://www.farnell.com/datasheets/1683491.pdf?src-supplier=Element14, ComponentLink6Description=http://www.mouser.com/ds/2/216/DC10YWA-43302.pdf?src-supplier=Mouser, ComponentLink6URL=http://www.mouser.com/ds/2/216/DC10YWA-43302.pdf?src-supplier=Mouser, ComponentLink7Description=http://www.produktinfo.conrad.com/datenblaetter/150000-174999/160142-da-01-en-BARGRAPH_ANZEIGE_TYP_DC_10YWA.pdf?src-supplier=Conrad, ComponentLink7URL=http://www.produktinfo.conrad.com/datenblaetter/150000-174999/160142-da-01-en-BARGRAPH_ANZEIGE_TYP_DC_10YWA.pdf?src-supplier=Conrad, Display Type="Bar Graph", Height=10.16mm, Illumination Color=Yellow, Lens Size=3mm, Lens Style=Diffused,Round,Domed, Luminous Intensity=9mcd, Mount="Through Hole", Number of LEDs=10, Number of Pins=20, Number of Segments=10, Operating Supply Voltage=2.1V, Packaging=Rail/Tube, Pricing 1="1=2.84, 10=2.517, 100=1.4616, 500=1.2992, 1000=1.1165, 2500=1.0556, 5000=1.03124, 10000=1.015, 25000=0.99064 (USD)", REACH SVHC="No SVHC", Stock 1=23, Supplier 1=Digi-Key, Supplier Part Number 1=754-1179-5-ND, Voltage Rating=2.1V, Wavelength=588nm, Width=25.4mm
L3: library part LEDBAR-10-GRN, "LED ARRAY 10X25MM 10SEG GRN DIFF", Color=Green, Current=25mA, Forward Current=20mA, Forward Voltage=2.2V, Manufacturer=Lumex, Manufacturer Part Number=SSA-LXB10GW-GF/LP, Max Operating Temperature=85°C, Min Operating Temperature=-40°C, Operating Supply Voltage=2.6V, Package Quantity=20, Power Consumption=105mW, ComponentLink1Description=http://www.lumex.com/content/files/ProductAttachment/SSA-LXB10GW-GF-LP.pdf?src-supplier=Digi-Key, ComponentLink1URL=http://www.lumex.com/content/files/ProductAttachment/SSA-LXB10GW-GF-LP.pdf?src-supplier=Digi-Key, ComponentLink2Description=http://www.farnell.com/datasheets/677482.pdf?src-supplier=Farnell, ComponentLink2URL=http://www.farnell.com/datasheets/677482.pdf?src-supplier=Farnell, ComponentLink3Description=http://www.farnell.com/datasheets/677482.pdf?src-supplier=Element14, ComponentLink3URL=http://www.farnell.com/datasheets/677482.pdf?src-supplier=Element14, ComponentLink4Description=http://www.farnell.com/datasheets/269031.pdf?src-supplier=Element14, ComponentLink4URL=http://www.farnell.com/datasheets/269031.pdf?src-supplier=Element14, ComponentLink5Description=http://www.mouser.com/ds/2/244/SSA-LXB10GW-GF%20LP-115645.pdf?src-supplier=Mouser, ComponentLink5URL=http://www.mouser.com/ds/2/244/SSA-LXB10GW-GF%20LP-115645.pdf?src-supplier=Mouser, Display Type="Bar Graph", Height=6.8mm, Illumination Color=Green, Lead Free="Lead Free", Length=25.1mm, Lens Style=Diffused, Luminous Intensity=8mcd, Mount="Through Hole", Number of Contacts=18, Number of LEDs=10, Packaging=Bulk, Pricing 1="1=2.28, 10=2.018, 100=1.1718, 500=1.0416, 1000=0.89513, 2500=0.8463, 5000=0.82677, 10000=0.81375 (USD)", REACH SVHC="No SVHC", Stock 1=6048, Supplier 1=Digi-Key, Supplier Part Number 1=67-1008-ND, Viewing Angle=160°, Voltage Rating=2.2V, Wavelength=565nm, Width=10.1mm
LS1: library part Buzzer, "AUDIO PIEZO TRANSDUCER 30V TH", Capacitance=28nF, Case/Package=Radial, Manufacturer=CUI, Manufacturer Part Number=CEP-1116, Max Operating Temperature=85°C, Min Operating Temperature=-30°C, Operating Supply Current=8mA, Self Resonant Frequency=2kHz, Voltage Rating=10V, Diameter=30mm, Height=10.5mm, Lead Free="Lead Free", Mount="Through Hole", Packaging=Bulk, Pricing 1="1=1.91, 10=1.588, 25=1.468, 50=1.3806, 100=1.2963, 500=1.11268, 1000=1.0621 (USD)", Stock 1=11267, Supplier 1=Digi-Key, Supplier Part Number 1=102-1141-ND, Termination="PC Pins", Washable=No
Q6 Q7 Q8: library part N-FET-60V-1.6A, "MOSFET N-CH 60V 1.6A SOT23", Case/Package=TO-236-3, Continuous Drain Current (ID)=1.6A, Drain to Source Voltage (Vdss)=60V, Input Capacitance=315pF, Manufacturer=Diodes, Manufacturer Part Number=DMN6140L-13, Max Operating Temperature=150°C, Max Power Dissipation=700mW, Min Operating Temperature=-55°C, Package Quantity=10000, Supplier Part Number 1=DMN6140L-13DIDKR-ND, ComponentLink1Description=https://www.diodes.com/assets/Datasheets/DMN6140L.pdf?src-supplier=Digi-Key, ComponentLink1URL=https://www.diodes.com/assets/Datasheets/DMN6140L.pdf?src-supplier=Digi-Key, Mount="Surface Mount", Packaging="Cut Tape", Pricing 1="1=0.34, 10=0.256, 25=0.224, 100=0.1217, 250=0.12104, 500=0.09926, 1000=0.07365, 2500=0.06468, 5000=0.05924 (USD)", Rds On Max=140mR, Stock 1=274948, Supplier 1=Digi-Key
R11 R12: library part 0603-44R, Case/Package=0603, Case Code (Metric)=1608, Manufacturer=Panasonic, Manufacturer Part Number=ERJ-3EKF44R2V, Max Operating Temperature=155°C, Max Power Dissipation=100mW, Min Operating Temperature=-55°C, Package Quantity=1, Resistance=44.2R, Resistance Tolerance=1%, Resistor Type="Thick Film", Supplier Part Number 1=P44.2HDKR-ND, Temperature Coefficient=100ppm/°C, Voltage Rating=75V, Voltage Rating (DC)=50V, Case Code (Imperial)=0603, ComponentLink1Description=http://industrial.panasonic.com/www-data/pdf/AOA0000/AOA0000CE2.pdf?src-supplier=Avnet, ComponentLink1URL=http://industrial.panasonic.com/www-data/pdf/AOA0000/AOA0000CE2.pdf?src-supplier=Avnet, ComponentLink2Description=http://industrial.panasonic.com/cdbs/www-data/pdf/RDA0000/AOA0000C304.pdf?src-supplier=Farnell, ComponentLink2URL=http://industrial.panasonic.com/cdbs/www-data/pdf/RDA0000/AOA0000C304.pdf?src-supplier=Farnell, ComponentLink3Description=http://www.farnell.com/datasheets/426256.pdf?src-supplier=Element14, ComponentLink3URL=http://www.farnell.com/datasheets/426256.pdf?src-supplier=Element14, Construction=Rectangular, Contact Plating=Tin, Depth=0.8mm, Features="Automotive AEC-Q200", Height=0.022inch, Length=1.6mm, Military Standard=Not, Mount="Surface Mount", Number of Terminations=2, Packaging="Tape and Reel", Power Rating=100mW, Pricing 1="1=0.1, 10=0.037, 100=0.0149, 1000=0.0067, 2500=0.00582 (USD)", REACH SVHC="No SVHC", RoHS Compliant=Yes, Series=ERJ, Stock 1=31052, Supplier 1=Digi-Key, Termination=SMD/SMT, Tolerance=1%, Weight=7.1E-05oz, Width=0.8mm
R13 R14 R15 R16 R17 R18 R19: library part 0603-270R, "RES SMD 270 OHM 0.5% 1/10W 0603", Case/Package=0603, Case Code (Metric)=1608, Manufacturer=Yageo, Manufacturer Part Number=RT0603DRE07270RL, Max Operating Temperature=155°C, Max Power Dissipation=100mW, Min Operating Temperature=-55°C, Package Quantity=5000, Resistor Type="Thin Film", Supplier Part Number 1=311-2504-1-ND, Temperature Coefficient=50ppm/°C, Tolerance=0.5%, Voltage Rating=75V, Voltage Rating (DC)=50V, Case Code (Imperial)=0603, ComponentLink1Description=http://www.yageo.com/NewPortal/yageodocoutput?fileName=/pdf/R-Chip/PYu-RT_1-to-0.05_RoHS_L_5.pdf&src-supplier=Digi-Key, ComponentLink1URL=http://www.yageo.com/NewPortal/yageodocoutput?fileName=/pdf/R-Chip/PYu-RT_1-to-0.05_RoHS_L_5.pdf&src-supplier=Digi-Key, Features="Moisture Resistant", Height=0.022inch, Lead Free="Lead Free", Length=0.063inch, Number of Terminations=2, Packaging="Tape and Reel", Power Rating=100mW, Pricing 1="1=0.1, 10=0.092, 100=0.0352, 1000=0.01549, 2500=0.01338 (USD)", Resistance=270R, RoHS Compliant=Yes, Series=RT, Stock 1=5811, Supplier 1=Digi-Key, Termination=SMD/SMT, Width=0.031inch
R20 R21 R22: library part 0603-10KR, "RES SMD 10K OHM 5% 1/10W 0603", Case/Package=0603, Case Code (Metric)=1608, Manufacturer=Yageo, Manufacturer Part Number=RC0603JR-0710KL, Max Operating Temperature=155°C, Max Power Dissipation=100mW, Min Operating Temperature=-55°C, Resistance=10kR, Supplier Part Number 1=311-10KGRDKR-ND, Temperature Coefficient=100ppm/°C, Tolerance=5%, Voltage Rating=50V, Case Code (Imperial)=0603, ComponentLink1Description=http://www.yageo.com/documents/recent/PYu-RC_Group_51_RoHS_L_10.pdf?src-supplier=Digi-Key, ComponentLink1URL=http://www.yageo.com/documents/recent/PYu-RC_Group_51_RoHS_L_10.pdf?src-supplier=Digi-Key, Composition="Thick Film", Contact Plating=Tin,Matte, Depth=0.8mm, Features="Moisture Resistant", Height - Seated (Max)=0.022inch, Lead Free="Lead Free", Length=0.063inch, Military Standard=Not, Number of Pins=2, Number of Terminations=2, Packaging="Tape and Reel", Power Rating=100mW, Pricing 1="1=0.1, 10=0.019, 100=0.0077, 1000=0.00347, 2500=0.00301 (USD)", Radiation Hardening=No, REACH SVHC=Unknown, Stock 1=3006558, Supplier 1=Digi-Key, Termination=SMD/SMT, Voltage Rating (DC)=50V, Width=0.031inch
R23: library part 0603-120R, "RES SMD 120 OHM 1% 1/10W 0603", Case/Package=0603, Case Code (Metric)=1608, Manufacturer=Yageo, Manufacturer Part Number=RC0603FR-07120RL, Max Operating Temperature=155°C, Max Power Dissipation=100mW, Min Operating Temperature=-55°C, Package Quantity=1, Supplier Part Number 1=311-120HRDKR-ND, Temperature Coefficient=100ppm/°C, Tolerance=1%, Voltage Rating=50V, Case Code (Imperial)=0603, ComponentLink1Description=http://www.yageo.com/documents/recent/PYu-RC_Group_51_RoHS_L_10.pdf?src-supplier=Digi-Key, ComponentLink1URL=http://www.yageo.com/documents/recent/PYu-RC_Group_51_RoHS_L_10.pdf?src-supplier=Digi-Key, ComponentLink2Description=http://www.farnell.com/datasheets/2167052.pdf?src-supplier=Element14, ComponentLink2URL=http://www.farnell.com/datasheets/2167052.pdf?src-supplier=Element14, ComponentLink3Description=http://www.farnell.com/datasheets/1868787.pdf?src-supplier=Element14, ComponentLink3URL=http://www.farnell.com/datasheets/1868787.pdf?src-supplier=Element14, ComponentLink4Description=http://www.farnell.com/datasheets/443971.pdf?src-supplier=Element14, ComponentLink4URL=http://www.farnell.com/datasheets/443971.pdf?src-supplier=Element14, Composition="Thick Film", Depth=0.8mm, Features="Moisture Resistant", Height=0.022inch, Lead Free="Lead Free", Length=1.6mm, Military Standard=Not, Number of Pins=2, Number of Terminations=2, Packaging="Tape and Reel", Power Rating=100mW, Pricing 1="1=0.1, 10=0.023, 100=0.0094, 1000=0.00421, 2500=0.00366 (USD)", REACH SVHC="No SVHC", Resistance=120R, Stock 1=1047274, Supplier 1=Digi-Key, Termination=SMD/SMT, Voltage Rating (DC)=50V, Width=0.031inch
R24: library part RC0603JR-0710KL, "RES SMD 10K OHM 5% 1/10W 0603", Case/Package=0603, Case Code (Metric)=1608, Manufacturer=Yageo, Max Operating Temperature=155°C, Max Power Dissipation=100mW, Min Operating Temperature=-55°C, Resistance=10kR, Supplier Part Number 1=311-10KGRDKR-ND, Temperature Coefficient=100ppm/°C, Tolerance=5%, Voltage Rating=50V, Case Code (Imperial)=0603, ComponentLink1Description=http://www.yageo.com/documents/recent/PYu-RC_Group_51_RoHS_L_10.pdf?src-supplier=Digi-Key, ComponentLink1URL=http://www.yageo.com/documents/recent/PYu-RC_Group_51_RoHS_L_10.pdf?src-supplier=Digi-Key, Composition="Thick Film", Contact Plating=Tin,Matte, Depth=0.8mm, Features="Moisture Resistant", Height - Seated (Max)=0.022inch, Lead Free="Lead Free", Length=0.063inch, Manufacturer Part Number=RC0603JR-0710KL, Military Standard=Not, Number of Pins=2, Number of Terminations=2, Packaging="Tape and Reel", Power Rating=100mW, Pricing 1="1=0.1, 10=0.019, 100=0.0077, 1000=0.00347, 2500=0.00301 (USD)", Radiation Hardening=No, REACH SVHC=Unknown, Stock 1=3006558, Supplier 1=Digi-Key, Termination=SMD/SMT, Voltage Rating (DC)=50V, Width=0.031inch
R25 R26: library part 0603-1KR, "RES SMD 1K OHM 1% 1/10W 0603", Case/Package=0603, Case Code (Metric)=1608, Manufacturer="Vishay Dale", Manufacturer Part Number=CRCW06031K00FKEA, Max Operating Temperature=155°C, Max Power Dissipation=100mW, Min Operating Temperature=-55°C, Package Quantity=10, Resistance=1kR, Supplier Part Number 1=541-1.00KHCT-ND, Temperature Coefficient=100ppm/°C, Tolerance=1%, Voltage Rating=75V, Case Code (Imperial)=0603, ComponentLink1Description=http://www.vishay.com/docs/20035/dcrcwe3.pdf?src-supplier=Digi-Key, ComponentLink1URL=http://www.vishay.com/docs/20035/dcrcwe3.pdf?src-supplier=Digi-Key, ComponentLink2Description=http://uk.rs-online.com/webdocs/0d98/0900766b80d98afc.pdf?src-supplier=RSComponents, ComponentLink2URL=http://uk.rs-online.com/webdocs/0d98/0900766b80d98afc.pdf?src-supplier=RSComponents, ComponentLink3Description=http://www.vishay.com/docs/20035/dcrcwe3.pdf?src-supplier=Avnet, ComponentLink3URL=http://www.vishay.com/docs/20035/dcrcwe3.pdf?src-supplier=Avnet, ComponentLink4Description=http://www.vishay.com/docs/20035/dcrcwe3.pdf?src-supplier=Avnet+Asia, ComponentLink4URL=http://www.vishay.com/docs/20035/dcrcwe3.pdf?src-supplier=Avnet+Asia, ComponentLink5Description=http://www.farnell.com/datasheets/2310790.pdf?src-supplier=Element14, ComponentLink5URL=http://www.farnell.com/datasheets/2310790.pdf?src-supplier=Element14, ComponentLink6Description=https://www.distrelec.biz/Web/Downloads/a_/en/flD-CRCW-e3_data_en.pdf?mime=application%2Fpdf&src-supplier=Distrelec, ComponentLink6URL=https://www.distrelec.biz/Web/Downloads/a_/en/flD-CRCW-e3_data_en.pdf?mime=application%2Fpdf&src-supplier=Distrelec, ComponentLink7Description=http://www.vishay.com/docs/20035/dcrcwe3.pdf?src-supplier=Future+Electronics, ComponentLink7URL=http://www.vishay.com/docs/20035/dcrcwe3.pdf?src-supplier=Future+Electronics, ComponentLink8Description=http://www.vishay.com/docs/20035/dcrcwe3.pdf?src-supplier=Avnet+Europe, ComponentLink8URL=http://www.vishay.com/docs/20035/dcrcwe3.pdf?src-supplier=Avnet+Europe, Composition="Thick Film", Contact Plating=Tin, Depth=0.85mm, Features="Automotive AEC-Q200", Height=0.45mm, Lead Free="Lead Free", Length=1.55mm, Military Standard=Not, Mount="Surface Mount", Number of Pins=2, Number of Terminations=2, Packaging="Tape and Reel", Power Rating=100mW, Pricing 1="1=0.1, 10=0.034, 100=0.0139, 1000=0.00623, 2500=0.0054 (USD)", Radiation Hardening=No, REACH SVHC=Unknown, Stock 1=671453, Supplier 1=Digi-Key, Termination=SMD/SMT, Voltage Rating (DC)=75V, Weight=7.1E-05oz, Width=0.033inch
R27: library part RC0603FR-072K2L, "RES SMD 2.2K OHM 1% 1/10W 0603", Case/Package=0603, Manufacturer="Yageo Phycomp", Max Operating Temperature=155°C, Min Operating Temperature=-55°C, Power Rating=100mW, Resistance=2.2kR, Supplier Part Number 1=311-2.20KHRDKR-ND, Temperature Coefficient=100ppm/°C, Tolerance=1%, Voltage Rating (DC)=50V, Depth=0.8mm, Height=0.45mm, Lead Free="Lead Free", Length=1.6mm, Manufacturer Part Number=RC0603FR-072K2L, Mount="Surface Mount", Number of Pins=2, Packaging="Cut Tape", Pricing 1="1=0.1, 10=0.023, 100=0.0094, 1000=0.00421, 2500=0.00366 (USD)", REACH SVHC="No SVHC", Stock 1=8205077, Supplier 1=Digi-Key, Width=800um
R28: library part RC0603FR-073K3L, "RES SMD 3.3K OHM 1% 1/10W 0603", Case/Package=0603, Manufacturer="Yageo Phycomp", Max Operating Temperature=155°C, Min Operating Temperature=-55°C, Power Rating=100mW, Resistance=3.3kR, Supplier Part Number 1=311-3.30KHRDKR-ND, Temperature Coefficient=100ppm/°C, Tolerance=1%, Voltage Rating (DC)=50V, Depth=0.8mm, Height=0.45mm, Lead Free="Lead Free", Length=1.6mm, Manufacturer Part Number=RC0603FR-073K3L, Mount="Surface Mount", Number of Pins=2, Packaging="Cut Tape", Pricing 1="1=0.1, 10=0.023, 100=0.0094, 1000=0.00421, 2500=0.00366 (USD)", REACH SVHC="No SVHC", Stock 1=3313966, Supplier 1=Digi-Key, Width=800um
U1: library part RasPi4, "CONNECTOR DEV BOARD RaspberryPi 4", Color=Black, Manufacturer=Sullins, Manufacturer Part Number=PPPC202LFBN-RC, Package Quantity=1000, Supplier Part Number 1=S7123-ND, Connector Type=Header, Contact Material=Bronze, Contact Plating=Gold, Contact Type="Female Socket", Height=8.5mm, Housing Material=Plastic, Lead Free="Lead Free", Length=51.3mm, Mount="Through Hole", Number of Positions=40, Number of Rows=2, Packaging=Bulk, Pitch=0.1inch, Pricing 1="1=2.38, 10=2.068, 80=1.84838, 440=1.54034, 1000=1.3203, 5000=1.1736 (USD)", RoHS Compliant=Yes, Row Spacing=0.1inch, Stock 1=10499, Supplier 1=Digi-Key, Termination=Solder, Width=5mm
U2: "IC DRVR 7 SEGMENT 16SOIC", Case/Package=SOIC, High Level Output Current=-25mA, Low Level Output Current=4.2mA, Manufacturer="ON Semiconductor", Max Operating Temperature=125°C, Max Supply Voltage=18V, Min Operating Temperature=-55°C, Min Supply Voltage=3V, Operating Supply Current=10uA, Package Quantity=2500, Quiescent Current=20uA, Supplier Part Number 1=MC14511BDR2GOSDKR-ND, ComponentLink1Description=https://www.verical.com/server-webapp/html/getDatasheet?partID=319336&src-supplier=Verical, ComponentLink1URL=https://www.verical.com/server-webapp/html/getDatasheet?partID=319336&src-supplier=Verical, ComponentLink2Description=http://www.onsemi.com/pub_link/Collateral/MC14511B-D.PDF?src-supplier=Digi-Key, ComponentLink2URL=http://www.onsemi.com/pub_link/Collateral/MC14511B-D.PDF?src-supplier=Digi-Key, Display Type=LCD, Halogen Free="Halogen Free", Lead Free="Lead Free", Logic Function=Decoder,Latch, Manufacturer Part Number=MC14511BDR2G, Mount="Surface Mount", Number of Bits=4, Number of Elements=1, Number of Input Lines=4, Number of Inputs=4, Number of Output Lines=7, Number of Outputs=7, Number of Pins=16, Packaging="Tape and Reel", Polarity=Non-Inverting, Pricing 1="1=0.63, 10=0.555, 25=0.5216, 100=0.4256, 250=0.39532, 500=0.33644, 1000=0.27772 (USD)", Propagation Delay=1440ns, Radiation Hardening=No, RoHS Compliant=Yes, Series=-, Stock 1=82, Supplier 1=Digi-Key, Technology=CMOS, Turn-On Delay Time=1440ns
U3: library part MCP2515-E/ML, "CAN CONTROLLER, 1TX/RX, QFN-20; IC Interface Type:SPI; No. of TX Buffers:3; No. of RX Buffers:2; Supply Voltage Min:2.7V; Supply Voltage Max:5.5V; Interface Case Style:QFN; No. of Pins:20; Operating Temperature Min:-40°C; Operating ;RoHS Compliant: Yes", Case/Package=QFN, Manufacturer=Microchip, Max Operating Temperature=125°C, Max Supply Current=10mA, Max Supply Voltage=5.5V, Min Operating Temperature=-40°C, Min Supply Voltage=2.7V, Package Quantity=91, Supplier Part Number 1=MCP2515-E/ML-ND, Category="Integrated Circuits (ICs)", ComponentLink1Description=https://datasheet.ciiva.com/46406/1669372-46406021.pdf?src-supplier=Element14, ComponentLink1URL=https://datasheet.ciiva.com/46406/1669372-46406021.pdf?src-supplier=Element14, Height=0.95mm, Interface=SPI, Length=4mm, Manufacturer Part Number=MCP2515-E/ML, Mount="Surface Mount", Number of Pins=20, Number of Receive Buffers=2, Number of Transceivers=1, Number of Transmit Buffers=3, Operating Supply Current=10mA, Packaging=Rail/Tube, Pricing 1="1=2.58000, 25=2.34000 (USD)", REACH SVHC="No SVHC", RoHS=Yes, Stock 1=1168, Supplier 1=Digi-Key, Width=4mm
U4: library part "CAN TRAN-MCP2562T-E/SN", "IC TRANSCEIVER HALF 1/1 8SOIC", Case/Package=SOIC, Manufacturer=Microchip, Manufacturer Part Number=MCP2562T-E/SN, Max Operating Temperature=125°C, Max Supply Voltage=5.5V, Min Operating Temperature=-40°C, Min Supply Voltage=4.5V, Nominal Supply Current=85uA, Package Quantity=3300, Supplier Part Number 1=MCP2562T-E/SNDKR-ND, ComponentLink1Description=http://ww1.microchip.com/downloads/en/DeviceDoc/25167B.pdf?src-supplier=Digi-Key, ComponentLink1URL=http://ww1.microchip.com/downloads/en/DeviceDoc/25167B.pdf?src-supplier=Digi-Key, ComponentLink2Description=http://ww1.microchip.com/downloads/en/DeviceDoc/25167B.pdf?src-supplier=Avnet, ComponentLink2URL=http://ww1.microchip.com/downloads/en/DeviceDoc/25167B.pdf?src-supplier=Avnet, Data Rate=1Mbps, Lead Free="Lead Free", Mount="Surface Mount", Number of Pins=8, Number of Transceivers=1, Packaging="Tape and Reel", Pricing 1="1=0.9, 25=0.75, 100=0.68 (USD)", Propagation Delay=125ns, Radiation Hardening=No, Receiver Hysteresis=200mV, Stock 1=0, Supplier 1=Digi-Key, Turn-On Delay Time=125ns
U5: "IC DAC 8BIT V-OUT 10MSOP", Case/Package=MSOP, Manufacturer=Microchip, Max Operating Temperature=125°C, Min Operating Temperature=-40°C, Supplier Part Number 1=MCP48FVB01T-E/UN-ND, ComponentLink1Description=http://www.microchip.com/mymicrochip/filehandler.aspx?ddocname=en584450&src-supplier=Digi-Key, ComponentLink1URL=http://www.microchip.com/mymicrochip/filehandler.aspx?ddocname=en584450&src-supplier=Digi-Key, Differential Output=No, Interface=SPI, Manufacturer Part Number=MCP48FVB01T-E/UN, Number of Bits=8, Number of D/A Converters=1, Packaging="Tape and Reel", Pricing 1="2500=0.585 (USD)", RoHS Compliant=Yes, Settling Time=7.8us, Stock 1=0, Supplier 1=Digi-Key
U6 U7 U8: "IC DRVR DOT/BAR DISPLAY 20PLCC", Case/Package=PLCC, Manufacturer="TI National Semiconductor", Max Operating Temperature=70°C, Max Power Dissipation=1.365W, Max Supply Current=9.2mA, Max Supply Voltage=25V, Min Operating Temperature=0°C, Output Current=30mA, Package Quantity=1000, Supplier Part Number 1=LM3914VX/NOPBDKR-ND, ComponentLink1Description=http://www.jameco.com/Jameco/Products/ProdDS/1282476.pdf?src-supplier=Jameco, ComponentLink1URL=http://www.jameco.com/Jameco/Products/ProdDS/1282476.pdf?src-supplier=Jameco, ComponentLink2Description=http://www.ti.com/general/docs/lit/getliterature.tsp?genericPartNumber=LM3914&&fileType=pdf&src-supplier=Avnet, ComponentLink2URL=http://www.ti.com/general/docs/lit/getliterature.tsp?genericPartNumber=LM3914&&fileType=pdf&src-supplier=Avnet, ComponentLink3Description=https://www.verical.com/server-webapp/html/getDatasheet?partID=632645&src-supplier=Verical, ComponentLink3URL=https://www.verical.com/server-webapp/html/getDatasheet?partID=632645&src-supplier=Verical, ComponentLink4Description=http://www.ti.com/lit/ds/symlink/lm3914.pdf?src-supplier=Digi-Key, ComponentLink4URL=http://www.ti.com/lit/ds/symlink/lm3914.pdf?src-supplier=Digi-Key, Display Type=LCD, Lead Free="Lead Free", Manufacturer Part Number=LM3914VX/NOPB, Mount="Surface Mount", Nominal Supply Current=9.2mA, Number of Channels=10, Number of Outputs=10, Number of Pins=20, Number of Segments=10, Packaging="Tape and Reel", Power Dissipation=1.365W, Pricing 1="1=4.32, 10=3.883, 25=3.6704, 100=3.1811, 250=3.01796, 500=2.70802 (USD)", Radiation Hardening=No, Series=LM3914, Stock 1=8115, Supplier 1=Digi-Key, Supply Current=9.2mA, Width=8.89mm
Y1: library part Crysatl-16Mhz, "CRYSTAL 16.0000MHZ 18PF SMD", ESR (Equivalent Series Resistance)=40R, Frequency=16MHz, Frequency Stability=30ppm, Load Capacitance=18pF, Manufacturer=Abracon, Manufacturer Part Number=ABLS2-16.000MHZ-D4Y-T, Max Operating Temperature=85°C, Min Operating Temperature=-40°C, Package Quantity=1000, Supplier Part Number 1=535-9875-6-ND, ComponentLink1Description=https://abracon.com/Resonators/ABLS2.pdf?src-supplier=Digi-Key, ComponentLink1URL=https://abracon.com/Resonators/ABLS2.pdf?src-supplier=Digi-Key, ComponentLink2Description=http://www.abracon.com/Resonators/ABLS2.pdf?src-supplier=Digi-Key, ComponentLink2URL=http://www.abracon.com/Resonators/ABLS2.pdf?src-supplier=Digi-Key, ComponentLink3Description=https://www.verical.com/server-webapp/html/getDatasheet?partID=719900&src-supplier=Verical, ComponentLink3URL=https://www.verical.com/server-webapp/html/getDatasheet?partID=719900&src-supplier=Verical, Depth=4.8mm, Frequency Tolerance=30ppm, Height=0.13inch, Lead Free="Lead Free", Length=11.05mm, Mount="Surface Mount", Packaging="Tape and Reel", Pricing 1="1=0.46, 10=0.385, 50=0.3466, 100=0.308, 500=0.2926 (USD)", REACH SVHC=Unknown, Series Resistance=40R, Stock 1=11099, Supplier 1=Digi-Key, Termination=SMD/SMT, Tolerance=30ppm, Width=0.185inch

## Free pads (board coordinates)
  round 4.4 hole 4.4: 1(-54.239,53.07) 1(-15,4.506) 1(15,4.506) 1(54.239,53.07)

## Via types
v1: diameter 0.7, hole 0.4, Top Layer to Bottom Layer, 92 vias

## Nets (pads, with @x,y where several pads share a name; then routed paths per layer and width w, separated by ;. In a path a pad name is that pad's centre, name@x,y a point inside that pad or via, vN(x,y) a via of type N, cw(c..) or ccw(c..) an arc to the next point about the centre after c; other vN are vias at no path point)
3V3: U1.1 U1.17 U4.5 U5.1 U5.3 | length 219.7
  Top Layer w0.254: v1@29.4,51.95 32.33,49.02 U1.17
  Top Layer w0.4: v1(-12.815,21.895) -12.815,23.985 -10.175,26.625 -5.15,26.625 -2.975,24.45 28.7,24.45 33.394,29.144 U1.1
  Bottom Layer w0.254: U5.3 -44.57,101.02 -44.9,101.35 -45.24,101.35 -45.57,101.02 U5.1 -45.57,99.605 -46.25,98.925 -46.25,63.925 -34.275,51.95 v1@29.4,51.95 ; U4.5 v1(-12.815,21.895)
  Bottom Layer w0.3: U1.1 39.7,29.851 39.7,44.088 U1.17
  other v1: 29.4,52
5V: J1.2 U1.2 U1.4 U2.3 U2.4 U2.16 U3.17 U3.18 U4.3 | length 195.6
  Top Layer w0.254: v1(25.457,76.91) 27.575,74.792 v1(27.575,74.37) v1(27.575,73.1)
  Top Layer w0.3: v1(27.575,73.1) 26.575,72.1 26.575,67.462 26.575,38.525 32.141,32.959 41.561,32.959 U1.4
  Top Layer w0.4: J1.2 -53.55,41.538 -53.55,34 -50.991,31.441 -50.991,23.416 -47.375,19.8 -10.885,19.8 ; v1(-10.885,23.165) -10.885,19.8 ; U1.4 U1.2 42.001,27.725 35.75,27.725 31,22.975 v1(-5.7,22.975) -5.7,20.725 -6.625,19.8 -10.885,19.8
  Bottom Layer w0.254: v1(-10.885,23.165) U4.3 ; v1(-5.7,22.975) -5.075,23.6 -4.29,23.6 ; U2.16 v1(25.457,76.91) ; v1(27.575,73.1) U2.4 ; v1(27.575,74.37) U2.3
12V: C4.2 C5.2 C6.2 C7.2 C8.2 C9.2 J1.1 L1.1 L1.2 L1.3 L1.4 L1.5 L1.6 L1.7 L1.8 L1.9 L1.10 L2.1 L2.2 L2.3 L2.4 L2.5 L2.6 L2.7 L2.8 L2.9 L2.10 L3.1 L3.2 L3.3 L3.4 L3.5 L3.6 L3.7 L3.8 L3.9 L3.10 U6.3 U6.11 U7.3 U7.11 U8.3 U8.11 | length 309.4
  Top Layer w0.254: -39.2,94.5 -39.2,108.85 ; v1@17.92,112.07 5.295,112.07 3.71,110.485 -0.62,110.485 -2.195,112.06 v1(-7.51,112.06) -20.135,112.06 -21.72,110.475 -26.05,110.475 -27.625,112.05 v1(-32.94,112.05) -38.2,112.05 -39.2,111.05 -39.2,108.85 ; v1(35.755,108.85) v1(-16.695,108.85) -39.2,108.85
  Top Layer w1.5: J1.1 -40.825,57.275 -40.825,92.825 -39.15,94.5 L1.1 L1.2 L1.3 L1.4 L1.5 L1.6 L1.7 L1.8 L1.9 L1.10 L2.1 L2.2 L2.3 L2.4 L2.5 L2.6 L2.7 L2.8 L2.9 L2.10 L3.5 L3.9 L3.10
  Bottom Layer w0.254: v1(-32.94,112.05) -31.545,112.05 -31.035,111.54 U6.3 ; U6.11 C4.2@-18.09,109 ; C4.2 -18.23,108.85 -16.845,108.85 v1@-16.695,109 ; v1(-7.51,112.06) C7.2 -5.605,111.55 U7.3 ; U7.11 7.34,109.01 7.5,108.85 v1@8.585,108.85 ; v1(17.93,112.05) C9.2 19.835,111.54 U8.3 ; U8.11 31.105,109 31.53,108.575 33.435,108.575 33.985,109.125 C8.2@34.335,109.125 ; C8.2 34.93,108.85 35.6,108.85 v1@35.755,109.005